# Allegro board PROIECT_APD_PCB.brd
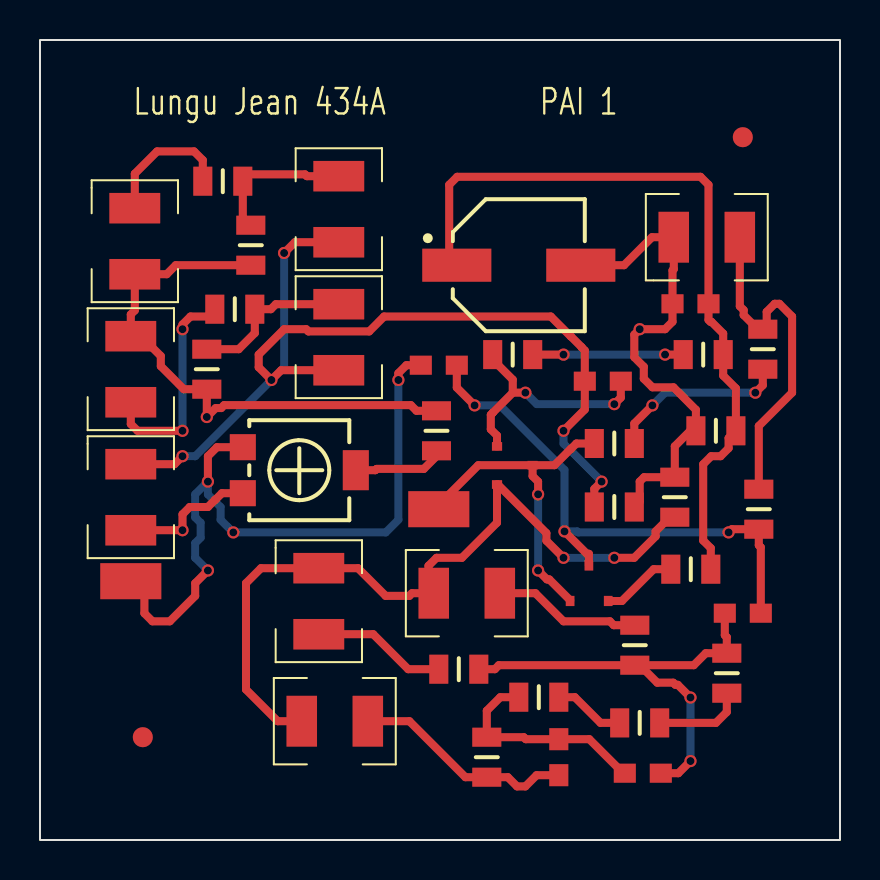
[diagram p0: board, top side]
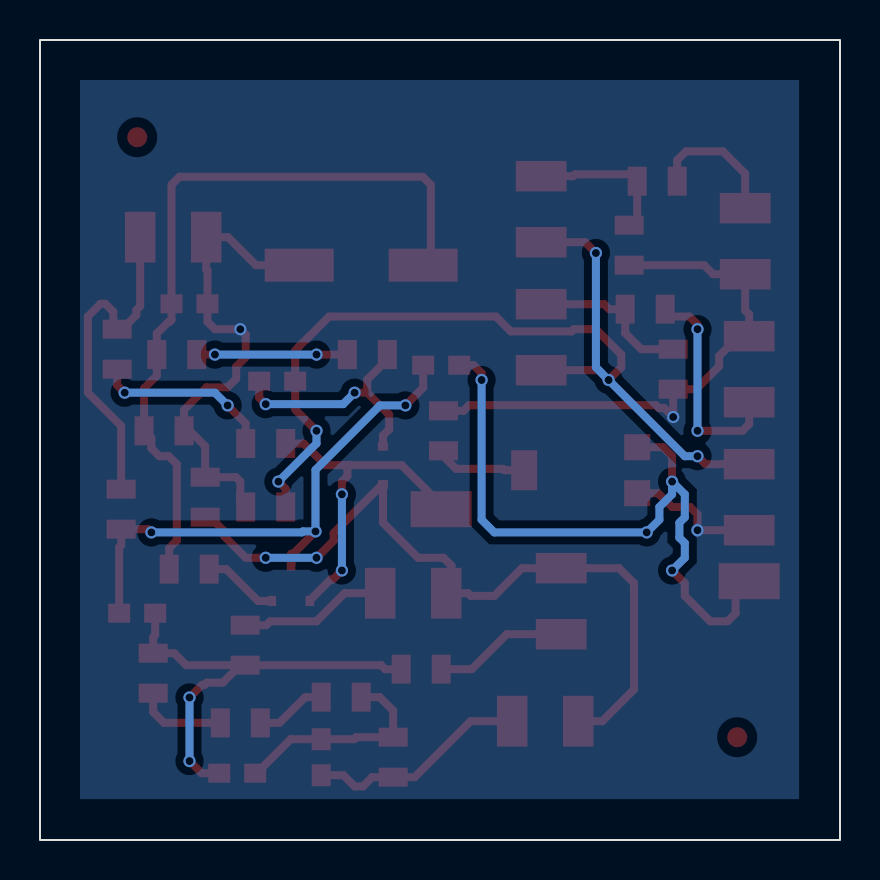
[diagram p1: board, bottom side, seen from below]

Outline 40 x 40 mm; copper layers: TOP, BOTTOM. Coordinates in mm from the lower left corner of the outline.
Outline path: rectangle 0,0 40,40

## Design rules (mm)
nets with their own width: min track width 0.4; nets 0 N35061 N35125 N35169 N35187 N35219 N35251 N35327 N35415 N35725 N35753 N35793 N36288 N36295 N36623 N36650 N36958 N37167 N37313 N41544 N41617 N41783 N42019 VCC

## Placement (name value [footprint] x y rotation side)
C18  1n  [CAPC2008X126N_0805]  25.94 4.14 90 top
C23  4.7u  [CAPC2008X126N_0805]  30.14 3.34 0 top
C27  2.2u  [CAPC2008X126N_0805]  28.14 22.94 0 top
C28  4.7u  [CAPC2008X126N_0805]  35.14 11.34 0 top
C30  4.7u  [CAPC2008X126N_0805]  19.94 23.74 180 top
C33  4.7u  [CAPC2008X126N_0805]  32.52 26.81 0 top
C34  1n  [CAPAE660X770N]  23.94 28.74 0 top
J1  PICK-UP-PIEZO1  [1210RF_WV_12D]  4.54 23.54 270 top
J2  PICK-UP-PIEZO2  [1210RF_WV_12D]  14.94 25.14 270 top
J3  MIC1  [1210RF_WV_12D]  4.54 17.14 90 top
J5  RADIO-MAG1  [1210RF_WV_12D]  4.74 29.94 90 top
J6  RADIO-MAG2  [1210RF_WV_12D]  14.94 31.54 270 top
J7  OUT  [SMD_PAD_3-05_1-80]  4.54 12.94 0 top
J8  POWER +18V  [1210RF_WV_12D]  33.34 30.14 180 top
J9  RADIO-MAG3  [1210RF_WV_12D]  21.34 12.34 0 top
J10  PICK-UP-PIEZO3  [1210RF_WV_12D]  13.94 11.94 90 top
J11  MIC2  [1210RF_WV_12D]  14.74 5.94 0 top
NOREF  -  [unnamed]  35.14 35.14 0 top
NOREF#2  -  [unnamed]  5.14 5.14 0 top
Q6  BC846B  [SOT23]  27.45 12.84 90 top
Q7  BC846B  [SOT23]  23.74 18.74 0 top
R6  330k  [RES2012X50N_0805]  33.16 24.27 0 top
R17  50k  [TS53YL]  10.14 17.34 180 top
R18  47k  [RES2012X50N_0805]  28.71 16.65 180 top
R19  1k  [RES2012X50N_0805]  31.74 17.14 270 top
R20  1k  [RES2012X50N_0805]  33.8 20.46 0 top
R21  1  [RES2012X50N_0805]  32.54 13.54 180 top
R25  100k  [RES2012X50N_0805]  36.14 24.54 90 top
R26  15k  [RES2012X50N_0805]  35.94 16.54 90 top
R27  47k  [RES2012X50N_0805]  19.82 20.46 270 top
R28  100k  [RES2012X50N_0805]  9.74 26.54 0 top
R29  4.7k  [RES2012X50N_0805]  8.34 23.54 90 top
R30  100k  [RES2012X50N_0805]  9.14 32.94 0 top
R31  3.9k  [RES2012X50N_0805]  10.54 29.74 90 top
R32  100k  [RES2012X50N_0805]  29.74 9.74 90 top
R33  220k  [RES2012X50N_0805]  20.94 8.54 180 top
R34  68k  [RES2012X50N_0805]  22.34 4.14 270 top
R35  510k  [RES2012X50N_0805]  24.94 7.14 180 top
R36  220k  [RES2012X50N_0805]  29.98 5.85 180 top
R38  100k  [RES2012X50N_0805]  34.34 8.34 270 top
R39  100k  [RES2012X50N_0805]  28.71 19.82 0 top
R40  15k  [RES2012X50N_0805]  23.64 24.27 0 top
TP  TEST-POINT  [SMD_PAD_3-05_1-80]  19.94 16.54 0 top

## Library data of the parts
C18 C23 C27 C28 C30 C33 = C
C34 = C_elect_0
J1-J3 J5 J6 J8-J11 = CON2
J7 TP = CON1
Q6 Q7 = BC846B
R6 R18-R21 R25-R36 R38-R40 = R
R17 = POT

## Footprints (pads in the part's own frame, mm; a bottom-side part is the same pattern mirrored in y, then rotated)
1210RF_WV_12D
  rect 1.524x2.54 smd: 1(-1.651,0) 2(1.651,0)
CAPAE660X770N
  rect 3.45x1.65 smd: 1(-3.1,0) 2(3.1,0)
CAPC2008X126N_0805
  rect 1.1x0.95 smd: 1(-0.9,0) 2(0.9,0)
RES2012X50N_0805
  rect 0.95x1.45 smd: 1(-1,0) 2(1,0)
SMD_PAD_3-05_1-80
  rect 3.05x1.8 smd: 1(0,0)
SOT23
  rect 0.508x0.432 smd: 1(-0.889,0.94) 2(-0.889,-0.965) 3(0.889,0)
TS53YL
  rect 1.3x1.3 smd: 1(0,0) 3(0,-2.3)
  rect 1.3x2 smd: 2(-5.65,-1.15)
unnamed
  round 1 smd: (0,0)

## Nets
VCC: J8.1 R25.2 R26.2
0: C33.1 C34.2(-) J1.1 J3.1 J5.1 J8.2 R17.1 R18.1 R19.1 R20.1 R27.1 R29.1 R31.1
N35061: C28.2 C30.1 Q6.3 R26.1
N35125: C30.2 J7.1 R17.3
N35169: Q6.1 Q7.3 R39.1 TP.1
N35187: Q6.2(E) R21.2
N35219: C27.2 Q7.1 R40.1
N35251: C33.2 C34.1 R6.2 R20.2 R21.1
N35327: C27.1 J2.2 J3.2 J6.2 R18.2
N35415: R17.2(T) R27.2
N35725: J9.1 J10.2 J11.1 Q7.2(E) R19.2
N35753: C23.2 C28.1 R32.1 R33.1 R38.1
N35793: C18.2 C23.1 R34.1 R35.2
N36288: J2.1 R28.2 R29.2
N36295: J1.2 R28.1
N36623: J5.2 R30.1
N36650: J6.1 R30.2 R31.2
N36958: J9.2 R32.2
N37167: J10.1 R33.2
N37313: C18.1 J11.2 R34.2
N41544: R6.1 R40.2
N41617: R35.1 R36.2
N41783: R36.1 R38.2
N42019: R25.1 R39.2

## Via types
v1: diameter 0.61, hole 0.4, TOP to BOTTOM, 29 vias

## Routing (per net, layer and track width the routed paths; a pad name or vN(x,y) marks a point on that pad's centre or on a via; arc(x,y) is an arc through that point)
VCC: length 17.2
  TOP w0.4: J8.1 34.99,26.69 35.18,26.5 35.18,26.25 35.89,25.54 R25.2 36.34,25.73 36.34,26.41 36.73,26.81 36.97,26.81 37.61,26.18 37.61,22.37 35.94,20.7 R26.2
0: length 59.1
  TOP w0.4: R18.1 29.98,16.92 29.98,17.92 30.21,18.14 R19.1 31.74,19.69 32.51,20.46 R20.1 32.8,21.51 31.67,22.63 30.62,22.63 30.19,23.06 30.19,23.66 29.72,24.14 29.72,25.27 v1(29.98,25.54) 31.25,25.54 31.62,25.91 C33.1 31.62,28.48 31.69,28.54 31.69,30.14 30.6,30.14 29.2,28.74 C34.2 ; R27.1 18.82,21.46 18.54,21.74 9.21,21.74 9.06,21.6 8.79,21.6 v1(8.34,21.15) R29.1 7.19,22.54 6.04,23.69 6.04,24.2 5.05,25.19 J1.1 4.54,26.28 4.74,26.48 J5.1 6.34,28.29 6.79,28.74 R31.1 ; R17.1 9.09,17.34 8.77,17.02 8.76,17.02 8.4,16.65 7.49,16.65 7.12,16.28 v1(7.12,15.49) J3.1
  BOTTOM w0.4: v1(7.12,15.49) 7.12,15.38
N35061: length 27.6
  TOP w0.4: C28.2 36.04,14.64 35.94,14.74 R26.1 34.59,15.54 v1(34.43,15.38) ; C30.1 20.84,22.62 v1(21.73,21.73) ; v1(26.22,15.43) 27.34,14.31 27.45,14.31 Q6.3
  BOTTOM w0.4: v1(34.43,15.38) 26.9,15.38 26.86,15.43 v1(26.22,15.43) 26.22,18.51 23,21.73 v1(21.73,21.73)
N35125: length 35.2
  TOP w0.4: J7.1 5.22,12.26 5.22,11.34 5.62,10.94 6.49,10.94 7.76,12.21 7.76,12.84 v1(8.4,13.48) ; v1(17.92,23) 17.92,23.34 18.32,23.74 C30.2 ; v1(8.4,17.92) 8.4,19.19 8.85,19.64 R17.3
  BOTTOM w0.4: v1(17.92,23) 17.92,16.02 17.29,15.38 v1(9.67,15.38) 9.03,16.02 9.03,16.65 8.4,17.29 v1(8.4,17.92) 7.76,17.29 7.76,16.13 8.03,15.86 8.03,15.11 7.76,14.84 7.76,14.11 v1(8.4,13.48)
N35169: length 16.9
  TOP w0.4: Q7.3 24.63,18.2 24.91,17.92 v1(24.91,17.29) ; Q7.3 21.91,18.74 19.94,16.77 TP.1 ; Q7.3 25.73,18.74 26.54,19.56 26.55,19.56 26.82,19.82 R39.1 ; Q6.1 26.51,11.99 25.47,13.03 25.35,13.03 v1(24.91,13.48)
  BOTTOM w0.4: v1(24.91,13.48) v1(24.91,17.29)
N35187: length 3.8
  TOP w0.4: R21.2 30.69,13.54 29.1,11.95 Q6.2
N35219: length 12.2
  TOP w0.4: 23.64,22.37 23.64,23.02 22.64,24.02 R40.1 ; 23.64,22.37 22.63,21.36 22.63,21.36 22.54,21.26 22.54,20.53 22.85,20.22 Q7.1 ; 23.64,22.37 v1(24.27,22.37) ; C27.2 29.04,22.12 v1(28.71,21.79)
  BOTTOM w0.4: v1(24.27,22.37) 24.84,21.79 v1(28.71,21.79)
N35251: length 38.4
  TOP w0.4: C34.1 20.46,29.12 20.46,32.76 20.86,33.16 33.02,33.16 33.42,32.76 C33.2 33.42,26.01 33.52,25.91 33.57,25.91 34.16,25.32 R6.2 34.16,23.22 34.8,22.58 R20.2 34.43,20.09 34.43,19.59 34.03,19.19 33.56,19.19 33.16,18.79 33.16,14.97 33.54,14.59 R21.1
N35327: length 50.6
  TOP w0.4: v1(7.12,19.19) 6.73,18.79 J3.2 ; v1(26.18,20.46) 27.24,21.53 C27.1 ; J6.2 12.74,29.89 v1(12.21,29.35) ; C27.1 27.24,24.48 27.08,24.64 27.08,24.64 26.55,25.17 26.54,25.17 25.54,26.18 17.2,26.18 16.46,25.43 13.42,25.43 13.31,25.54 12.21,25.54 10.94,24.27 10.94,23.64 v1(11.57,23) 12.06,23.49 J2.2 ; C27.1 27.32,22.94 ; v1(28.08,17.92) 27.71,17.55 R18.2
  BOTTOM w0.4: v1(7.12,19.19) 7.76,19.19 v1(11.57,23) 12.21,23.64 v1(12.21,29.35) ; v1(26.18,20.46) 26.18,19.82 v1(28.08,17.92)
N35415: length 4.6
  TOP w0.4: R17.2 16.77,18.49 16.83,18.55 19.19,18.55 19.82,19.19 R27.2
N35725: length 38.4
  TOP w0.4: v1(26.18,14.11) 25.32,14.97 25.32,15.34 22.89,17.77 Q7.2 22.85,15.87 21.09,14.11 19.82,14.11 19.43,13.71 19.43,12.6 J9.1 18.6,12.34 18.46,12.21 17.29,12.21 15.9,13.59 J10.2 11.05,13.59 10.3,12.84 10.3,7.52 11.88,5.94 J11.1 ; R19.2 31.49,16.14 30.78,15.43 30.78,15.18 29.71,14.11 v1(28.71,14.11)
  BOTTOM w0.4: v1(26.18,14.11) v1(28.71,14.11)
N35753: length 22.9
  TOP w0.4: C28.1 34.24,10.24 34.34,10.14 R38.1 33.29,9.34 32.69,8.74 29.99,8.74 ; v1(32.52,3.95) 31.92,3.34 C23.2 ; 29.99,8.74 30.87,7.87 31.66,7.87 31.77,7.76 31.89,7.76 v1(32.52,7.12) ; 29.99,8.74 R32.1 22.94,8.74 22.74,8.54 R33.1
  BOTTOM w0.4: v1(32.52,3.95) v1(32.52,7.12)
N35793: length 10.9
  TOP w0.4: R35.2 23.02,7.14 22.34,6.46 R34.1 24.19,5.14 24.29,5.04 C18.2 27.46,5.04 29.16,3.34 C23.1
N36288: length 8.2
  TOP w0.4: R29.2 9.94,24.54 10.74,25.34 R28.2 11.54,26.54 11.79,26.79 J2.1
N36295: length 11.1
  TOP w0.4: v1(7.12,20.46) 4.88,20.46 4.54,20.8 J1.2 ; v1(7.12,25.54) 7.12,25.78 7.52,26.18 8.38,26.18 R28.1
  BOTTOM w0.4: v1(7.12,20.46) v1(7.12,25.54)
N36623: length 6.8
  TOP w0.4: R30.1 8.14,33.99 7.7,34.43 5.85,34.43 4.74,33.31 J5.2
N36650: length 7.4
  TOP w0.4: J6.1 13.34,33.19 13.25,33.28 10.42,33.28 10.14,33 R30.2 10.14,31.14 R31.2
N36958: length 7.4
  TOP w0.4: R32.2 28.69,10.74 28.49,10.94 26.18,10.94 24.77,12.34 J9.2
N37167: length 6.7
  TOP w0.4: J10.1 16.66,10.29 18.41,8.54 R33.2
N37313: length 11.1
  TOP w0.4: J11.2 18.47,5.94 21.27,3.14 R34.2 23.39,3.14 23.85,2.68 24.27,2.68 24.83,3.24 C18.1
N41544: length 7.5
  TOP w0.4: R40.2 v1(26.18,24.27) ; v1(31.25,24.27) R6.1
  BOTTOM w0.4: v1(31.25,24.27) v1(26.18,24.27)
N41617: length 3.6
  TOP w0.4: R36.2 28.03,5.85 26.74,7.14 R35.1
N41783: length 4.5
  TOP w0.4: R36.1 33.8,5.85 34.34,6.4 R38.2
N42019: length 9
  TOP w0.4: R25.1 36.14,22.74 v1(35.77,22.37) ; v1(30.62,21.73) 29.71,20.82 R39.2
  BOTTOM w0.4: v1(30.62,21.73) 31.25,22.37 v1(35.77,22.37)

## Copper pours and planes (outline as drawn; the poured copper is in the pictures)
0 on BOTTOM: 2.04,2.04 2.04,38 38,38 38,2.04

## Text on the board
Ref Des/Silkscreen Top: Lungu Jean 434A | PAI 1
XSECTION_CHART: *  SURFACE | L1 TOP CONDUCTOR | *  DIELECTRIC | L2 BOTTOM CONDUCTOR | DESIGN CROSS SECTION CHART | ___________________________ | TOTAL THICKNESS 1.6 MM | 1-2
DISPLAY_TOP: FIGURE | FINISHED_SIZE | 0.3302 | DRILL CHART: TOP to BOTTOM | ALL UNITS ARE IN MILLIMETERS | PLATED | QTY | 32
